# Altium PCB LOKI-PSS-V1-r3.0.0.PcbDoc
Units mm, origin at the board's own origin, x right, y up, seen from the top; angles counter-clockwise.
Board outline 15 x 32.5 mm, 2 copper layers (Top Layer, Bottom Layer), stack 1.595 mm thick; 18 components, 13 nets, 66 pads, 8 vias.
Unrouted connection lines stored in the file: 4.
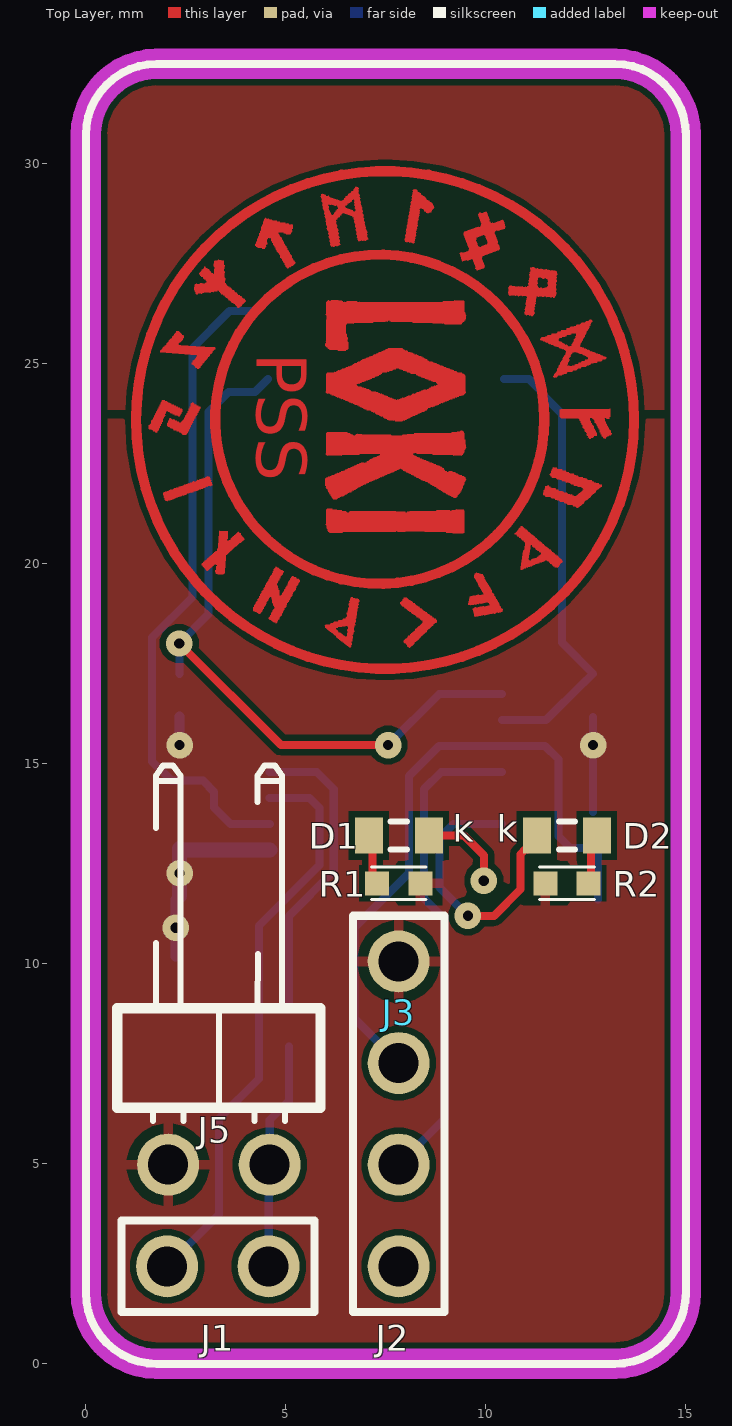
[diagram p0: Top Layer view]
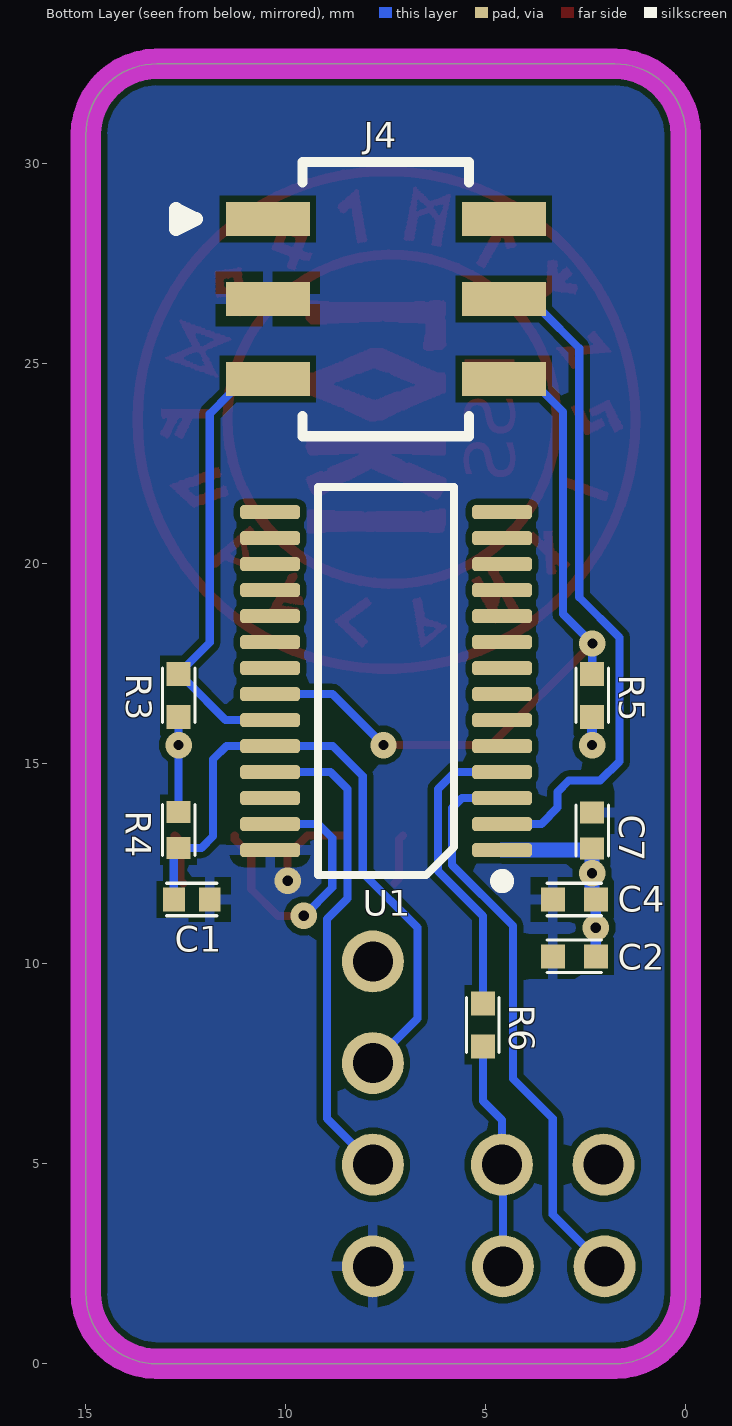
[diagram p1: Bottom Layer view, seen from below]

## Layer stack, top to bottom
Top Solder: solder mask 0.0254, Solder Resist, Dk 3.5
Top Layer: signal copper 0.0356
Dielectric 1: dielectric 1.524, FR-4, Dk 4.8
Bottom Layer: signal copper 0.0356
Bottom Solder: solder mask 0.0254, Solder Resist, Dk 3.5

## Board outline
1.778,0 cw(c1.778,1.778) 0,1.778 0,30.722 cw(c1.778,30.722) 1.778,32.5 13.222,32.5 cw(c13.222,30.722) 15,30.722 15,1.778 cw(c13.222,1.778) 13.222,0

## Design rules (kind name [scope] priority, off if disabled: settings)
BoardOutlineClearance [All] p1: gap=0.381 ignorepadtopadclearanceinfootprint=FALSE
Clearance [All] p1: gap=0.152 ignorepadtopadclearanceinfootprint=FALSE
MinimumSolderMaskSliver [All] p1: minsoldermaskwidth=0.097
PolygonConnect [All] p1: thpad.connectstyle=Relief thpad.reliefconductorwidth=0.254 thpad.reliefentries=4 thpad.polygonreliefangle="90 Angle" thpad.airgapwidth=0.254 smdpad.connectstyle=Relief smdpad.reliefconductorwidth=0.254 smdpad.reliefentries=4 smdpad.polygonreliefangle="90 Angle" smdpad.airgapwidth=0.254 via.connectstyle=Direct via.reliefconductorwidth=0.254 via.reliefentries=4 via.polygonreliefangle="90 Angle" via.airgapwidth=0.254
RoutingVias [All] p1: holewidth=0.711 width=1.27 viastyle="Through Hole" minholewidth=0.254 minwidth=0.508 maxholewidth=0.711 maxwidth=1.27
SilkToSilkClearance [All] p1: silktosilkclearance=0.127
SilkToSolderMaskClearance [IsPad] p1: minsilkscreentomaskgap=0.076 clearancetoexposedcopper=TRUE
SolderMaskExpansion [All] p1: expansion=0.051 istentingtop=FALSE
Width [All] p1: maxlimit=2.54 minlimit=0.152 preferedwidth=0.254
27 further rules are at their usual default settings.

## Components (designator, comment, footprint, x,y, rotation, side; value= is the part's Value field where it differs from the comment)
C1 "2.2nF" C0402_BEI 12.351,11.608 r0 bottom
C2 "1uF" C0402_L 2.788,10.185 r180 bottom
C4 "1uF" C0402_L 2.788,11.608 r180 bottom
C7 "100nF" C0402_BEI 2.344,13.335 r270 bottom
D1 "LED-ORANGE" LED0603_L_ORANGE 7.824,13.208 r0 top
D2 "LED-BLUE" LED0603_L_BLUE 12.025,13.208 r180 top
J1 "Header_2POS" H2_2.54mm_S_THOLE 3.302,2.438 r0 top
J2 "Header_2POS" H2_2.54mm_S_THOLE 7.823,3.708 r270 top
J3 "Header_2POS" H2_2.54mm_S_THOLE 7.823,8.788 r270 top
J4 "2x3 Connector" BF100-06-X-X-1-0640 7.5,26.619 r180 bottom
J5 "Header_2POS" 2POS_RA_TH 3.327,4.978 r180 top
R1 "470" R0402_L 7.824,12.014 r0 top
R2 "470" R0402_L 12.025,12.014 r180 top
R3 "8.2K" R0402_L 12.682,16.713 r270 bottom
R4 "47k" R0402_BEI 12.682,13.347 r90 bottom
R5 "8.2K" R0402_L 2.344,16.713 r270 bottom
R6 "2K" R0402_L 5.075,8.475 r90 bottom
U1 "MSP430G2553IPW28" 28-TSSOP_L 7.493,17.069 r0 bottom

## Footprints (in the part's own frame and the unit in brackets; to place one, negate y for a bottom-side part, rotate by r counter-clockwise, add the part's x,y. Pads: shape width x height; smd on the part's side, far side on the other; paste and mask are expansions set on the pad)
2POS_RA_TH [mm]
  round 1.55 hole 1: 1(-1.27,0) 2(1.27,0)
  silkscreen extent -2.54,-9.98 2.54,-1.09, body extent -2.54,-10.04 2.54,0.32, height 2.54
28-TSSOP_L [mm]
  rrect50% 1.5x0.35 smd: 1(-2.9,4.225) 2(-2.9,3.575) 3(-2.9,2.925) 4(-2.9,2.275) 5(-2.9,1.625) 6(-2.9,0.975) 7(-2.9,0.325) 8(-2.9,-0.325) 9(-2.9,-0.975) 10(-2.9,-1.625) 11(-2.9,-2.275) 12(-2.9,-2.925) 13(-2.9,-3.575) 14(-2.9,-4.225) 15(2.9,-4.225) 16(2.9,-3.575) 17(2.9,-2.925) 18(2.9,-2.275) 19(2.9,-1.625) 20(2.9,-0.975) 21(2.9,-0.325) 22(2.9,0.325) 23(2.9,0.975) 24(2.9,1.625) 25(2.9,2.275) 26(2.9,2.925) 27(2.9,3.575) 28(2.9,4.225)
  silkscreen extent -3,-4.85 1.7,5.1, body extent -3.21,-4.85 3.21,4.85, height 0.99
BF100-06-X-X-1-0640 [mm]
  rect 2.1x0.85 smd: 1(-2.95,2) 2(-2.95,0) 3(-2.95,-2) 4(2.95,-2) 5(2.95,0) 6(2.95,2)
  silkscreen extent -5.25,-3.43 2.08,3.43, body extent -3.2,-3.3 3.2,3.3, height 4.6
C0402_BEI [mm]
  rect 0.549x0.599 smd mask+0.051: 1(-0.45,0) 2(0.45,0)
  silkscreen extent -0.64,-0.41 0.64,0.41, body extent -0.5,-0.25 0.5,0.25, height 0.49
C0402_L [mm]
  rect 0.6x0.6 smd mask+0.051: 1(-0.538,0) 2(0.538,0)
  silkscreen extent -0.69,-0.41 0.69,0.41, body extent -0.5,-0.25 0.5,0.25, height 0.49
H2_2.54mm_S_THOLE [mm]
  round 1.55 hole 1 mask+0.07: 1(-1.27,0) 2(1.27,0)
  silkscreen extent -2.41,-1.14 2.41,1.14
LED0603_L_BLUE [mm]
  rect 0.7x0.9 smd mask+0.051: 1(-0.75,0) 2(0.75,0)
  silkscreen extent -0.2,-0.35 0.2,0.35, body extent -0.81,-0.4 0.81,0.4, height 0.6
LED0603_L_ORANGE [mm]
  rect 0.7x0.9 smd mask+0.051: 1(-0.75,0) 2(0.75,0)
  silkscreen extent -0.2,-0.35 0.2,0.35, body extent -0.8,-0.4 0.8,0.4, height 0.8
R0402_BEI [mm]
  rect 0.549x0.599 smd mask+0.051: 1(-0.45,0) 2(0.45,0)
  silkscreen extent -0.64,-0.41 0.64,0.41, body extent -0.5,-0.25 0.5,0.25, height 0.3
R0402_L [mm]
  rect 0.6x0.6 smd mask+0.051: 1(-0.538,0) 2(0.538,0)
  silkscreen extent -0.69,-0.41 0.69,0.41, body extent -0.5,-0.25 0.5,0.25, height 0.3

## Part data
C1: library part "GRM155R71H222KA01D (2)", "CAP CER 2200PF 50V 10% X7R 0402", Manufacturer="Murata Electronics North America", Manufacturer Part Number=GRM155R71H222KA01D, Operating Temperature="-55°C ~ 125°C", Package / Case="0402 (1005 Metric)", Supplier Part Number 1=490-1305-1-ND, Temperature Coefficient=X7R, Tolerance=±10%, Voltage - Rated=50V, Applications="General Purpose", Capacitance=2.2nF, Category=Capacitors, Mounting Type="Surface Mount, MLCC", Packaging="Cut Tape (CT)", Part Number="GRM155R71H222KA01D (2)", Size / Dimension="0.039\" L x 0.020\" W (1.00mm x 0.50mm)", Supplier 1=Digi-Key, Thickness="0.022\" (0.55mm)"
C2 C4: library part JMK105BJ105KV-F, "CAP CER 1UF 6.3V X5R 0402", Manufacturer="Taiyo Yuden", Operating Temperature="-55°C ~ 85°C", Package / Case="0402 (1005 Metric)", Ratings=-, Supplier Part Number 1=587-1231-1-ND, Temperature Coefficient=X5R, Tolerance=±10%, Voltage - Rated=6.3V, Applications="General Purpose", Capacitance=1uF, Category=Capacitors, ComponentLink1Description=http://ds.yuden.co.jp/TYCOMPAS/ut/detail.do?productNo=JMK105BJ105KV-F&fileName=JMK105BJ105KV-F_SS&mode=specSheetDownload, ComponentLink1URL=http://ds.yuden.co.jp/TYCOMPAS/ut/detail.do?productNo=JMK105BJ105KV-F&fileName=JMK105BJ105KV-F_SS&mode=specSheetDownload, Features=-, Height - Seated (Max)=-, Lead Spacing=-, Lead Style=-, Manufacturer Part Number=JMK105BJ105KV-F, Mounting Type="Surface Mount, MLCC", Packaging="Cut Tape (CT)", Part Number=JMK105BJ105KV-F, Part Status=Active, Pricing 1="1=0.1, 10=0.013, 100=0.0056, 500=0.004, 1000=0.00315, 2500=0.00286, 5000=0.00263 (USD)", RoHS="RoHS Compliant", Size / Dimension="0.039\" L x 0.020\" W (1.00mm x 0.50mm)", Stock 1=0, Supplier 1=Digi-Key, Thickness (Max)="0.022\" (0.55mm)"
C7: library part C1005X5R1A104K050BA, "CAP CER 0.1UF 10V X5R 0402", Manufacturer="TDK Corporation", Operating Temperature="-55°C ~ 85°C", Owlet Part Number=E0072, Package / Case="0402 (1005 Metric)", Ratings=-, Supplier Part Number 1=445-1265-2-ND, Temperature Coefficient=X5R, Tolerance=±10%, Voltage - Rated=10V, Applications="General Purpose", Capacitance=100nF, Category=Capacitors, ComponentLink1Description=https://product.tdk.com/info/en/catalog/datasheets/mlcc_commercial_general_en.pdf, ComponentLink1URL=https://product.tdk.com/info/en/catalog/datasheets/mlcc_commercial_general_en.pdf, Failure Rate=-, Features="Low ESL", Height - Seated (Max)=-, Lead Spacing=-, Lead Style=-, Manufacturer Part Number=C1005X5R1A104K050BA, Mounting Type="Surface Mount, MLCC", Notification="Current market demand for these product types have resulted in fluctuating and extending lead times. Lead times may differ.", Packaging="Tape & Reel (TR)", Part Number=C1005X5R1A104K050BA, Part Status="Not For New Designs", Pricing 1="10000=0.00785, 20000=0.00748, 30000=0.00711 (USD)", RoHS="RoHS Compliant", Size / Dimension="0.039\" L x 0.020\" W (1.00mm x 0.50mm)", Stock 1=2060000, Supplier 1=Digi-Key, Thickness (Max)="0.022\" (0.55mm)"
D1: library part B1931UD--05D000314U1930, "Led Orange Clear 1608 SMD", Manufacturer=Inolux, Supplier Part Number 1=3147-B1931UD--05D000314U1930CT-ND, Manufacturer Part Number=B1931UD--05D000314U1930, Part Number=B1931UD--05D000314U1930, RoHS=No, Supplier 1=Digi-Key
D2: library part LTST-C191TBKT, "Single Color LED, Ultra Bright Blue, Water Clear, 1.1mm", Color=Blue, Forward Current=20mA, Forward Voltage=3.8V, Manufacturer="Vishay Lite-On", Max Operating Temperature=80°C, Min Operating Temperature=-20°C, Reverse Voltage-Max=5V, Category=LEDs, Channels=1, Color@wavelength=Blue, ComponentLink1Description=https://datasheet.ciiva.com:443/pdfs/VipMasterIC/IC/LITE/LITE-S-A0009182577/LITE-S-A0009182577-1.pdf?src-supplier=IHS+Markit, ComponentLink1URL=https://datasheet.ciiva.com:443/pdfs/VipMasterIC/IC/LITE/LITE-S-A0009182577/LITE-S-A0009182577-1.pdf?src-supplier=IHS+Markit, ComponentLink2Description=https://datasheet.ciiva.com/2110/ltst-c191tbkt-2110256.pdf?src-supplier=Digi-Key, ComponentLink2URL=https://datasheet.ciiva.com/2110/ltst-c191tbkt-2110256.pdf?src-supplier=Digi-Key, ComponentLink3Description=https://datasheet.ciiva.com/19465/2047945-19465673.pdf?src-supplier=Jameco, ComponentLink3URL=https://datasheet.ciiva.com/19465/2047945-19465673.pdf?src-supplier=Jameco, ComponentLink4Description=https://datasheet.ciiva.com/11774/0900766b80dc02b4-11774413.pdf?src-supplier=RSComponents, ComponentLink4URL=https://datasheet.ciiva.com/11774/0900766b80dc02b4-11774413.pdf?src-supplier=RSComponents, JESD-609 Code=e3, Lens Style="WATER CLEAR", Luminous Intensity-Min=130cd, Luminous Intensity-Nom=104mcd, Manufacturer Part Number=LTST-C191TBKT, Mounting Technology="Surface Mount", Optoelectronic Device Type="SINGLE COLOR LED", Overall Height=0.55mm, Packaging="Tape and Reel", Part Number=LTST-C191TBKT, Pins=2, Pricing 1="1=0.32580, 10=0.28310, 25=0.24740, 100=0.16540, 250=0.11260, 500=0.11150, 1000=0.08270, 3000=0.08190 (USD)", Reach SVHC Compliant=Yes, RoHS=Yes, RoHS Compliant=Yes, Shape=Rectangular, Size=1.1mm, Stock 1=3644, Supplier 1="Arrow Electronics", Supplier Part Number 1=LTST-C191TBKT, Terminal Finish=Tin, Terminal Pitch=1.5mm, Viewing Angle=130°
J1 J2 J3: library part TSW-106-08-L-S-R, "Conn Unshrouded Header HDR 2 POS 2.54mm Solder S Thru-Hole", Part Number=TSW-106-08-L-S-R
J4: library part BF100-06-A-D-0-0640-L-C, "6POS, 2MM PITCH SOCKET, DIL, SMT", Part Number=BF100-06-A-D-0-0640-L-C
J5: library part PH1RB-02-UA, "Conn Unshrouded Header HDR 2 POS 2.54mm Solder RA Thru-Hole", Manufacturer="Adam Equipment", Supplier Part Number 1=2057-PH1RB-02-UA-ND, Category=Connectors, Manufacturer Part Number=PH1RB-02-UA, Part Number=PH1RB-02-UA, Pricing 1="1=0.10000, 10=0.06500, 100=0.04830, 500=0.04000, 1000=0.03500, 5000=0.03000, 10000=0.02916 (USD)", RoHS=No, Stock 1=23642, Supplier 1=Digi-Key
R1 R2: library part ERJ-2RKF4700X, "RES 470 OHM 1/10W 1% 0402 SMD", Manufacturer="Panasonic - ECG", Package / Case="0402 (1005 Metric)", Power (Watts)="0.1W, 1/10W", Supplier Part Number 1=P470LCT-ND, Temperature Coefficient=±100ppm/°C, Tolerance=±1%, Category=Resistors, ComponentLink1Description=http://industrial.panasonic.com/www-cgi/jvcr13pz.cgi?E+PZ+3+AOA0002+ERJ2RKF4700X+7+WW, ComponentLink1URL=http://industrial.panasonic.com/www-cgi/jvcr13pz.cgi?E+PZ+3+AOA0002+ERJ2RKF4700X+7+WW, Composition="Thick Film", Features=-, Height="0.016\" (0.40mm)", Manufacturer Part Number=ERJ-2RKF4700X, Number of Terminations=2, Packaging="Cut Tape (CT)", Part Number=ERJ-2RKF4700X, Pricing 1="1=0.06, 50=0.0242, 100=0.0184, 250=0.01364, 500=0.01008, 1000=0.00672, 5000=0.00473 (USD)", Resistance (Ohms)=470, RoHS="RoHS Compliant", Size / Dimension="0.039\" L x 0.020\" W (1.00mm x 0.50mm)", Stock 1=363974, Supplier 1=Digi-Key
R3 R5: library part ERJ-2RKF8201X, "RES 8.20K OHM 1/10W 1% 0402 SMD", Manufacturer="Panasonic - ECG", Package / Case="0402 (1005 Metric)", Power (Watts)="0.1W, 1/10W", Resistance (Ohms)=8.2k, Supplier Part Number 1=P8.20KLCT-ND, Temperature Coefficient=±100ppm/°C, Tolerance=±1%, Category=Resistors, ComponentLink1Description=http://industrial.panasonic.com/www-cgi/jvcr13pz.cgi?E+PZ+3+AOA0002+ERJ2RKF8201X+7+WW, ComponentLink1URL=http://industrial.panasonic.com/www-cgi/jvcr13pz.cgi?E+PZ+3+AOA0002+ERJ2RKF8201X+7+WW, Composition="Thick Film", Features=-, Height="0.016\" (0.40mm)", Manufacturer Part Number=ERJ-2RKF8201X, Number of Terminations=2, Packaging="Cut Tape (CT)", Part Number=ERJ-2RKF8201X, Pricing 1="1=0.06, 50=0.0242, 100=0.0184, 250=0.01364, 500=0.01008, 1000=0.00672, 5000=0.00473 (USD)", RoHS="RoHS Compliant", Size / Dimension="0.039\" L x 0.020\" W (1.00mm x 0.50mm)", Stock 1=82374, Supplier 1=Digi-Key
R4: library part "ERJ-2GEJ473X (2)", "RES SMD 47K OHM 5% 1/10W 0402", Manufacturer="Panasonic Electronic Components", Manufacturer Part Number=ERJ-2GEJ473X, Operating Temperature="-55°C ~ 155°C", Owlet Part Number=E0067, Package / Case="0402 (1005 Metric)", Power (Watts)="0.1W, 1/10W", Supplier Device Package=0402, Supplier Part Number 1=P47KJCT-ND, Temperature Coefficient=±200ppm/°C, Tolerance=±5%, Category=Resistors, ComponentLink1Description=http://industrial.panasonic.com/www-cgi/jvcr13pz.cgi?E+PZ+3+AOA0001+ERJ2GEJ473X+7+WW, ComponentLink1URL=http://industrial.panasonic.com/www-cgi/jvcr13pz.cgi?E+PZ+3+AOA0001+ERJ2GEJ473X+7+WW, Composition="Thick Film", Failure Rate=-, Features="Automotive AEC-Q200", Height - Seated (Max)="0.016\" (0.40mm)", Packaging="Cut Tape (CT)", Part Number="ERJ-2GEJ473X (2)", Part Status=Active, Pricing 1="1=0.1, 10=0.026, 100=0.0107, 1000=0.00479, 2500=0.00416, 5000=0.00344 (USD)", Resistance (Ohms)=47k, RoHS="RoHS Compliant", Size / Dimension="0.039\" L x 0.020\" W (1.00mm x 0.50mm)", Stock 1=3897027, Supplier 1=Digi-Key
R6: library part RC0402JR-072KL, "RES 2.0K OHM 1/16W 5% 0402 SMD", Manufacturer=Yageo, Package / Case="0402 (1005 Metric)", Power (Watts)="0.063W, 1/16W", Resistance (Ohms)=2k, Supplier Device Package=0402, Supplier Part Number 1=311-2.0KJRCT-ND, Temperature Coefficient=±100ppm/°C, Tolerance=±5%, Category=Resistors, ComponentLink1Description=http://www.yageo.com/documents/recent/PYu-RC0402_51_RoHS_L_6.pdf, ComponentLink1URL=http://www.yageo.com/documents/recent/PYu-RC0402_51_RoHS_L_6.pdf, Composition="Thick Film", Features=-, Height="0.016\" (0.40mm)", Manufacturer Part Number=RC0402JR-072KL, Number of Terminations=2, Packaging="Cut Tape (CT)", Part Number=RC0402JR-072KL, Pricing 1="1=0.1, 10=0.013, 25=0.0092, 100=0.0053, 250=0.004, 500=0.0032, 1000=0.00236, 2500=0.00205, 5000=0.00169 (USD)", RoHS="RoHS Compliant", Size / Dimension="0.039\" L x 0.020\" W (1.00mm x 0.50mm)", Stock 1=88201, Supplier 1=Digi-Key
U1: library part MSP430G2553IPW28R, "MSP430 MSP430G2xx Microcontroller IC 16-Bit 16MHz 16KB (16K x 8) FLASH 28-TSSOP", Manufacturer="Texas Instruments", Category=Microcontrollers, Manufacturer Part Number=MSP430G2553IPW28R, Part Number=MSP430G2553IPW28R, Pricing 1="1=3.54200, 10=3.10160, 25=2.97160, 100=2.55990, 250=2.41040, 500=2.19190, 1000=1.98950 (USD)", RoHS=Yes, Stock 1=2000, Supplier 1="Arrow Electronics", Supplier Part Number 1=MSP430G2553IPW28R

## Via types
v1: diameter 0.66, hole 0.254, Top Layer to Bottom Layer, tented both sides, 8 vias

## Nets (pads, with @x,y where several pads share a name; then routed paths per layer and width w, separated by ;. In a path a pad name is that pad's centre, name@x,y a point inside that pad or via, vN(x,y) a via of type N, cw(c..) or ccw(c..) an arc to the next point about the centre after c; other vN are vias at no path point)
3V3: C2.2 C4.2 C7.2 J3.1 J5.2 R1.2 R2.2 R3.2 R4.2 R5.2 U1.1 | length 8.1
  Bottom Layer w0.203: R4.2 R3.2
  Bottom Layer w0.254: C2.2 v1(2.25,10.901) C4.2 C4.2@2.344,11.702 ; v1(2.344,15.469) R5.2
  Bottom Layer w0.381: C4.2@2.344,11.702 C7.2 2.381,12.848 U1.1@4.6,12.848
  other v1: 2.344,12.263 12.682,15.468
DEBUG_UART_MCU_RXD: J1.1 U1.3 | length 14.4
  Bottom Layer w0.203: J1.1 3.326,3.733 3.326,6.128 4.325,7.127 4.325,10.951 5.842,12.468 5.842,13.894 5.592,14.144 U1.3
DEBUG_UART_MCU_TXD: J1.2 J5.1 R6.1 | length 5.7
  Bottom Layer w0.203: J1.2 4.572,4.953 J5.1 4.597,6.096 5.075,6.574 R6.1
GND: C1.1 C2.1 C4.1 C7.1 D1.2 J2.2 J4.2 U1.28 | length 2.2
  Top Layer w0.203: D1.2 9.456,13.208 9.954,12.709 9.954,12.079 v1(9.95,12.075)
L\E\D\_\O\N\: D2.2 U1.27 | length 7.1
  Top Layer w0.203: v1@9.552,11.2 10.2,11.2 10.864,11.864 10.864,12.741 10.983,12.86 11.027,12.86 11.275,13.108 D2.2
  Bottom Layer w0.203: v1(9.552,11.2) v1(9.552,11.2) 8.839,11.911 8.839,13.143 9.195,13.498 U1.27@10.4,13.498
M\C\U\_\R\S\T\: C1.2 J3.2 R4.1 U1.24 | length 16.6
  Bottom Layer w0.203: J3.2 6.713,8.629 6.713,10.904 8.077,12.268 8.077,14.7 8.826,15.448 10.393,15.448 11.483,15.448 11.818,15.113 11.818,13.19 12.11,12.898 R4.1 12.801,12.778 C1.2
NetD1_1: D1.1 R1.1 | length 1.3
  Top Layer w0.203: D1.1 7.167,13.114 7.167,12.133 R1.1
NetD2_1: D2.1 R2.1 | length 1.3
  Top Layer w0.203: R2.1 12.631,12.082 12.631,12.623 12.63,12.624 12.63,13.063 D2.1
NetR6_2: R6.2 U1.4 | length 7.6
  Bottom Layer w0.203: U1.4 5.774,14.794 6.198,14.37 6.198,12.321 5.075,11.199 R6.2
PSU_EN: J4.5 U1.2 | length 17
  Bottom Layer w0.203: J4.5 4.252,26.321 3.595,26.321 2.664,25.39 2.664,20.472 2.664,19.164 1.658,18.158 1.658,15.062 2.141,14.58 2.928,14.58 3.207,14.3 3.207,13.903 3.612,13.498 U1.2@4.6,13.498
SCL: J4.4 R5.1 U1.22 | length 18.3
  Top Layer w0.203: v1(2.337,18.009) 4.877,15.469 v1(7.557,15.469)
  Bottom Layer w0.203: R5.1 2.34,17.255 2.34,18.005 v1(2.337,18.009) 3.07,18.742 3.07,23.801 3.565,24.296 4.227,24.296 J4.4 ; v1(7.557,15.469) 8.837,16.748 U1.22@10.4,16.748
SDA: J4.3 R3.1 U1.23 | length 11.4
  Bottom Layer w0.203: U1.23@10.4,16.098 11.508,16.098 12.462,17.053 12.483,17.053 R3.1 11.902,18.031 11.902,23.75 11.398,24.254 11.398,24.296 11.075,24.619 J4.3
TEST: J2.1 U1.25 | length 12.2
  Bottom Layer w0.203: J2.1 8.973,6.128 8.973,11.118 8.458,11.633 8.458,14.37 8.887,14.798 U1.25@10.4,14.798
pads on no net: J4.1 J4.6 U1.5 U1.6 U1.7 U1.8 U1.9 U1.10 U1.11 U1.12 U1.13 U1.14 U1.15 U1.16 U1.17 U1.18 U1.19 U1.20 U1.21 U1.26
copper on no net: | length 65
  Top Layer w0.254: 11.462,23.616 ccw(c7.347,23.616) 11.462,23.616 ; 13.703,23.597 ccw(c7.48,23.597) 13.703,23.597

## Polygon pours and split planes (outlines as drawn)
3V3 on Top Layer "Top Layer-3V3" (solid, remove dead copper, pour order 0): 1.778,0 cw(c1.778,1.778) 0,1.778 0,23.625 15,23.625 15,2.057 cw(c13.082,1.918) 13.222,0 11.595,0
no net on Top Layer "NONET_L01_P002" (solid, pour order 2): 0,23.85 0,30.683 cw(c1.778,30.683) 1.778,32.461 13.156,32.461 cw(c13.242,30.707) 14.997,30.793 15.001,23.85
GND on Bottom Layer "Bottom Layer-GND" (solid, remove dead copper, pour order 1): 1.778,0 cw(c1.778,1.778) 0,1.778 0,30.683 cw(c1.778,30.683) 1.778,32.461 13.336,32.456 cw(c13.228,30.688) 14.997,30.579 15,1.778 cw(c13.222,1.778) 13.222,0 11.595,0

## Keep-outs
Keep-Out Layer:
  the board outline again, w0.762

## Other copper
Top Layer:
  drawing of 24 lines, arcs and shapes, not listed
  text "PSS" at 4.277,25.278 h1.25 r270

## Silkscreen, mask and mechanical layers (free items; w line width, h text height)
Top Overlay:
  lines w0.15: 1.75,10.525 1.753,8.89 ; 4.293,8.89 4.3,10.25
  lines w0.203: 6.68,6.121 6.68,6.375 ; 8.966,6.121 8.966,6.375 ; 0,1.778 ccw(c1.778,1.778) 1.778,0 13.222,0 ccw(c13.222,1.778) 15,1.778 15,30.722 ccw(c13.222,30.722) 13.222,32.5 1.778,32.5 ccw(c1.778,30.722) 0,30.722 0,2.54 0,1.778
Top Solder:
  drawing of 35 lines, arcs and shapes, not listed
  text "PSS" at 4.277,25.278 h1.25 r270
  text "PWR" at 6.533,13.972 h1.5
  text "PSU" at 10.734,13.972 h1.5
  text "DATA" at 3.325,13.85 h1.75 r270
  text "3V3" at 0.768,13.188 h1.75 r270
  text "TOWARDS / CONTROL  / BOARD EDGE" at 9.742,12.893 h1.75 r270
Bottom Solder:
  drawing of 15 lines, arcs and shapes, not listed
  text "ZACK BOMSTA" at 13.4,30.629 h1.14 r90
  text "LOKI-PSS-V1-r3.0.0" at 1.95,30.175 h1.52 r90
  text "2023-05-10" at 14.2,27.919 h1.14 r90

## Text inside footprints (layer, text, board x,y; h text height)
D1: Top Overlay "k" at 9.175,12.825 h1.14
D2: Top Overlay "k" at 10.275,12.825 h1.14